# Altium PCB PCB_Persion_Counter.PcbDoc
Units mil, origin at the board's own origin, x right, y up, seen from the top; angles counter-clockwise.
Board outline 3190.03 x 2460.03 mil, 2 copper layers (Top Layer, Bottom Layer); 56 components, 63 nets, 203 pads, 39 vias.
Unrouted connection lines stored in the file: 2.
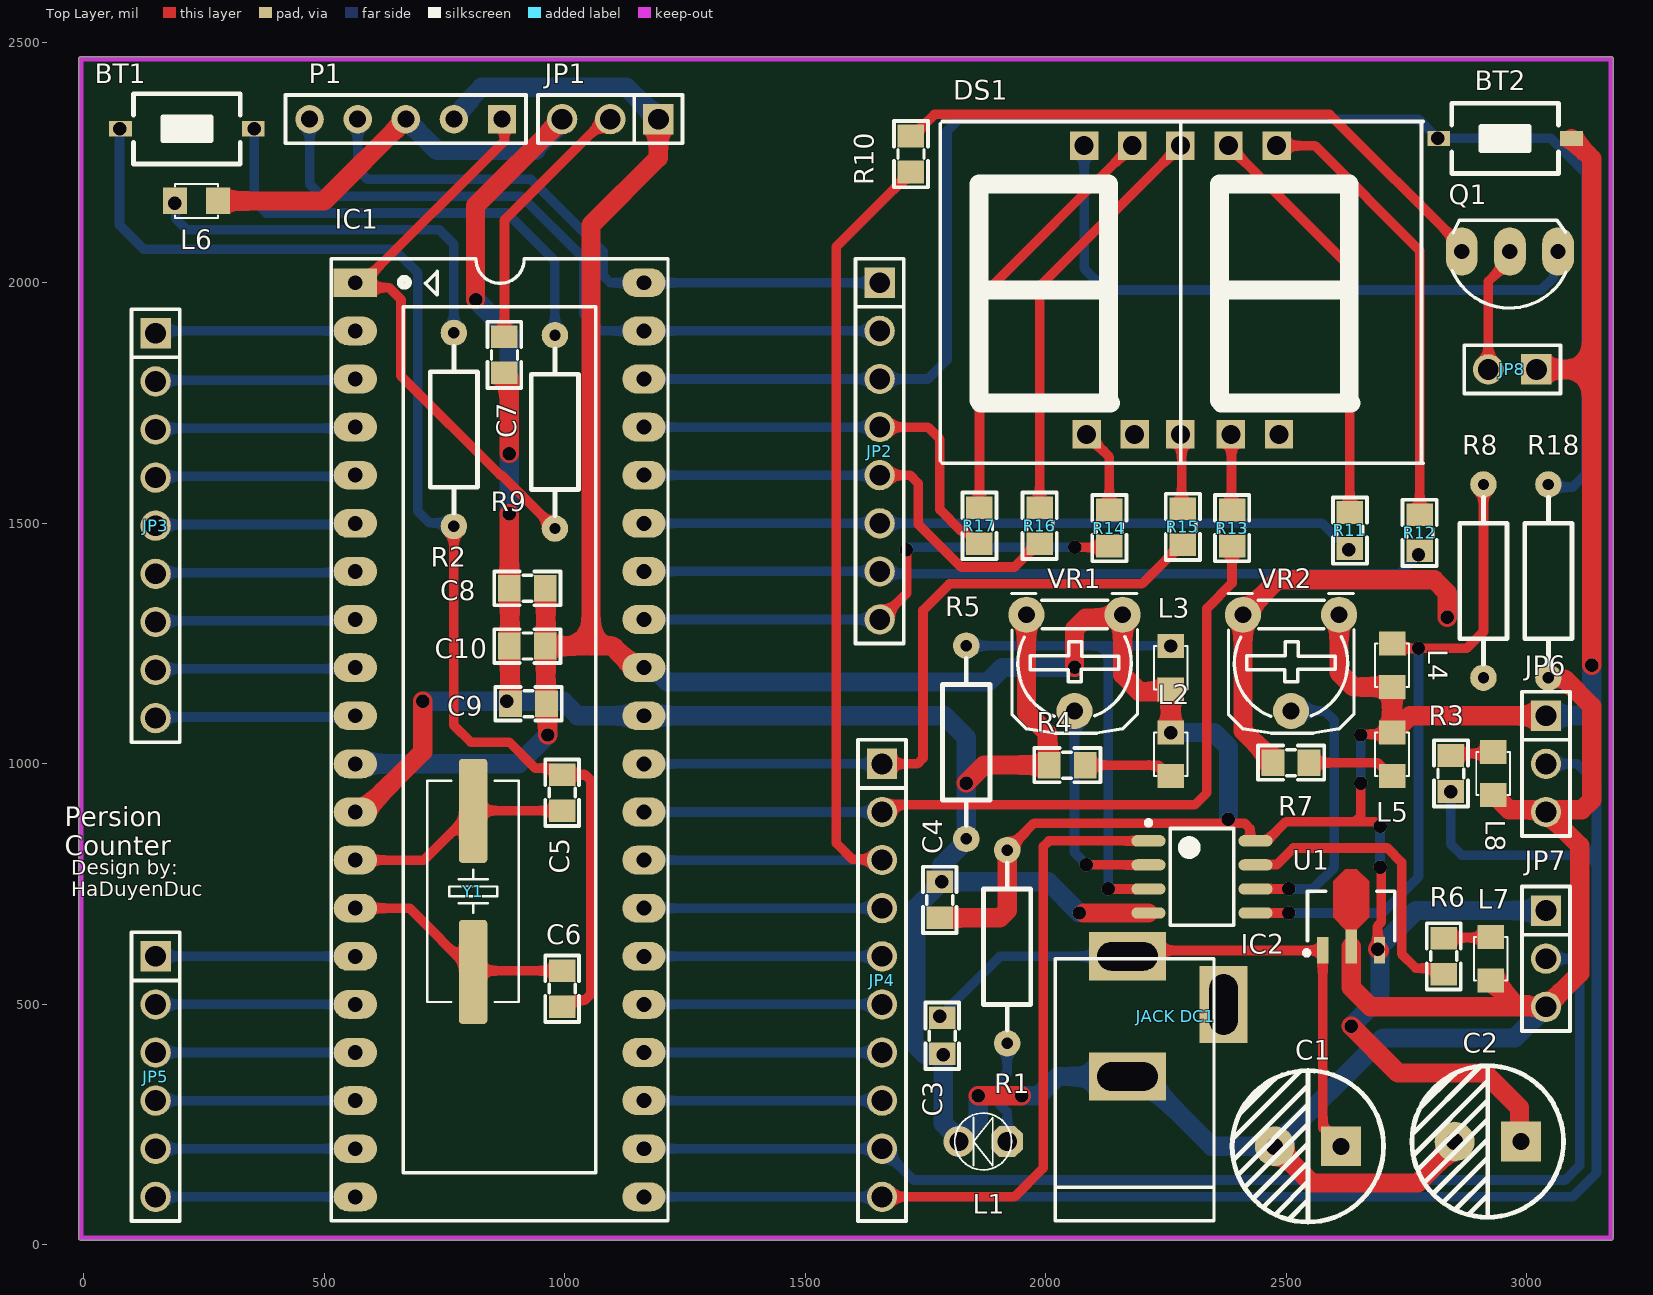
[diagram p0: Top Layer view]
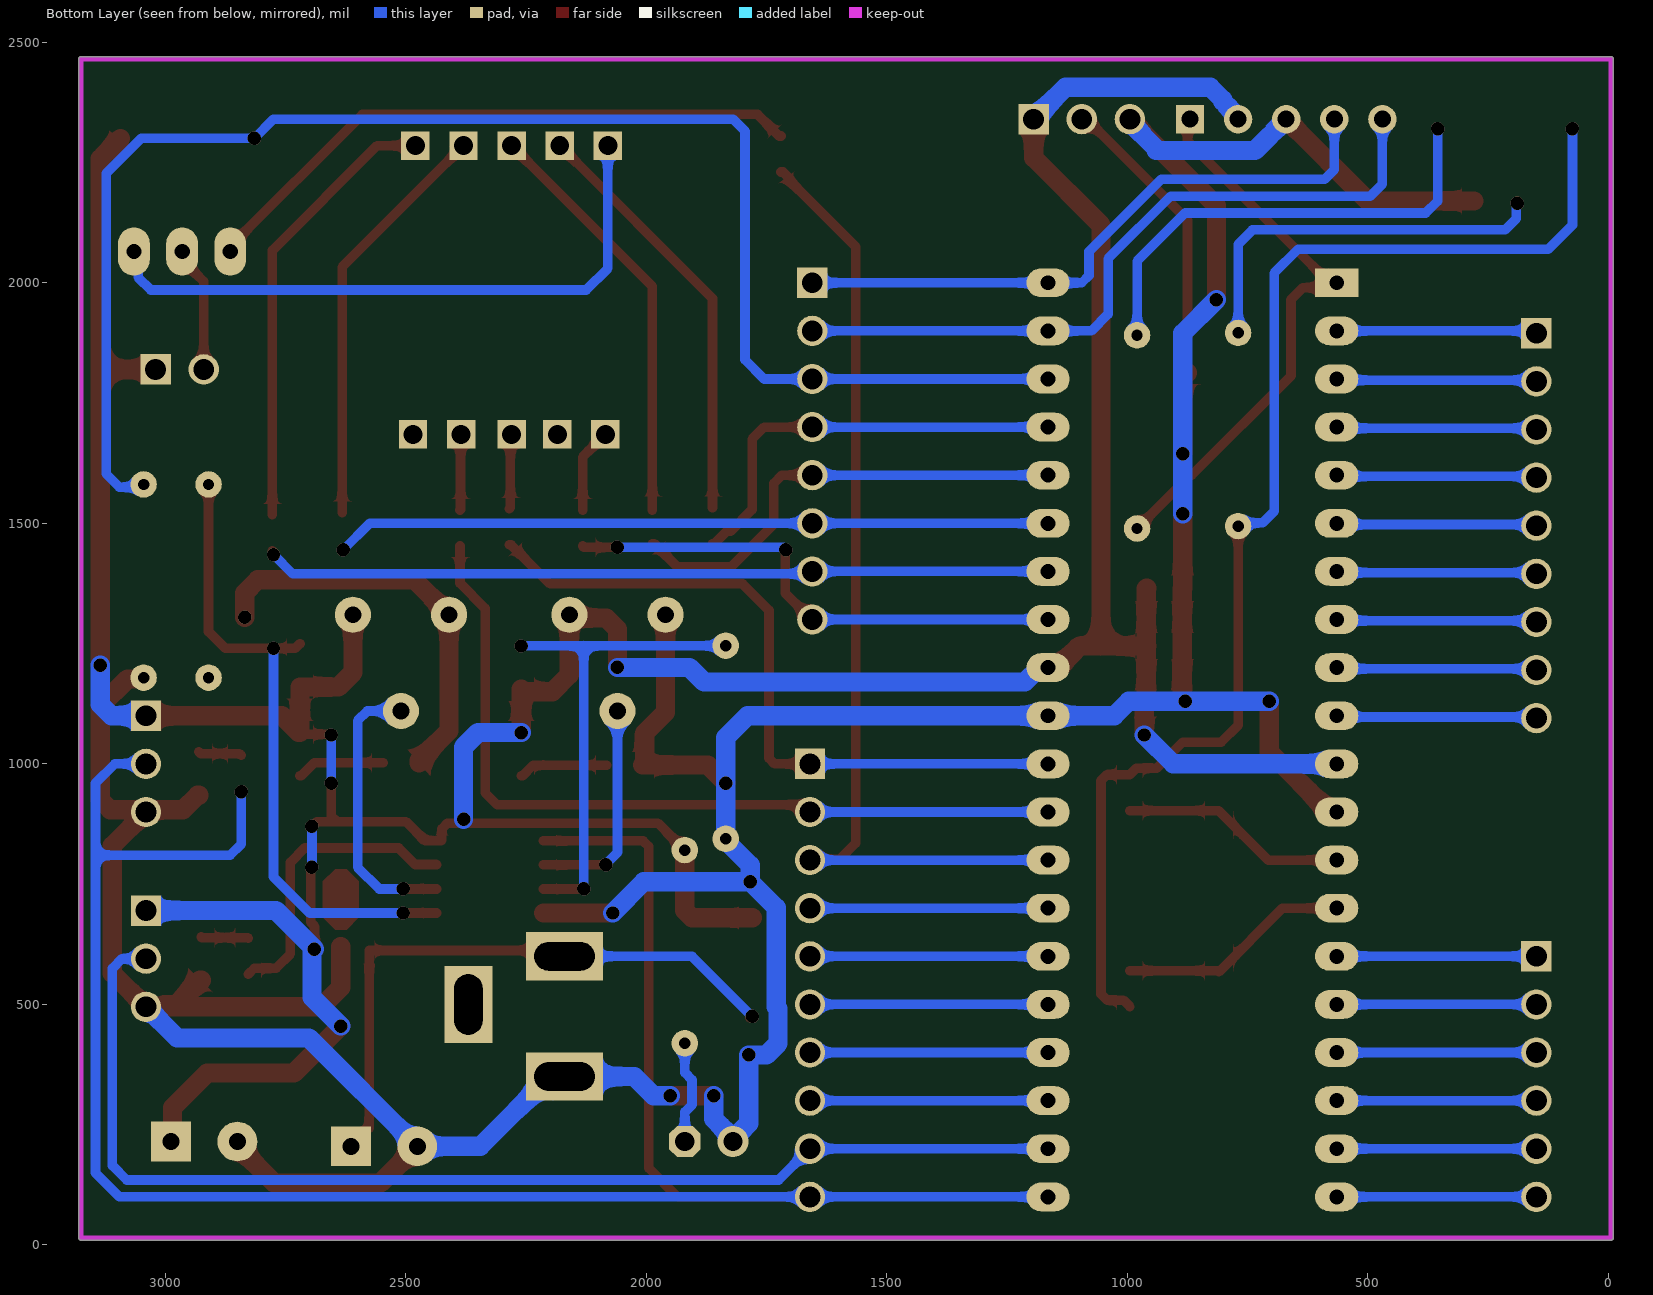
[diagram p1: Bottom Layer view, seen from below]

## Layer stack, top to bottom
Top Solder: solder mask 0.4, Solder Resist, Dk 3.5
Top Layer: signal copper 1.4
Dielectric 1: dielectric 12.6, FR-4, Dk 4.8
Bottom Layer: signal copper 1.4
Bottom Solder: solder mask 0.4, Solder Resist, Dk 3.5

## Board outline
-10.01,15 ccw(c-5,15) -5,9.99 3175,9.99 ccw(c3175,15) 3180.02,15 3180.02,2465 ccw(c3175,2465) 3175,2470.02 3090,2470.02 -5,2470.01 ccw(c-5,2465) -10.01,2465

## Design rules (kind name [scope] priority, off if disabled: settings)
Clearance POLYGON [InPolygon] p1: gap=30 ignorepadtopadclearanceinfootprint=FALSE
Clearance [All] p2: gap=15 ignorepadtopadclearanceinfootprint=FALSE
DiffPairsRouting [All] p1: maxlimit=40 minlimit=10 mostfreqgap=20 toplayer_minwidth=10 toplayer_maxwidth=40 toplayer_prefwidth=20 bottomlayer_minwidth=10 bottomlayer_maxwidth=40 bottomlayer_prefwidth=20 maxuncoupledlength=500
PolygonConnect [All] p1: connectstyle=Relief reliefconductorwidth=10 reliefentries=4 polygonreliefangle="90 Angle" airgapwidth=10
RoutingVias [All] p1: holewidth=28 width=50 viastyle="Through Hole" minholewidth=20 minwidth=10 maxholewidth=30 maxwidth=15
SolderMaskExpansion [All] p1: expansion=4 istentingtop=FALSE
Width [All] p1: maxlimit=40 minlimit=10 preferedwidth=20
29 further rules are at their usual default settings.

## Components (designator, comment, footprint, x,y, rotation, side; value= is the part's Value field where it differs from the comment)
BT1 "Nut Nhan 2 Chan SMD 3x6x2.5" "Nut Nhan 2 Chan SMD 3x6x2.5" 215,2320 r0 top
BT2 "Nut Nhan 2 Chan SMD 3x6x2.5" "Nut Nhan 2 Chan SMD 3x6x2.5" 2955,2300 r0 top
C1 "470uF" "tu hoa 8mm" 2545,205 r180 top
C2 "470uF" "tu hoa 8mm" 2918.9,215 r180 top
C3 "104" "tu 0805" 1785,435 r270 top
C4 "104" "tu 0805" 1779.87,717.23 r90 top
C5 "33pF" "tu 0805" 995,940 r90 top
C6 "33pF" "tu 0805" 994.87,532.43 r90 top
C7 "104" "tu 0805" 875,1850 r90 top
C8 "104" "tu 0805" 922.77,1364.87 r180 top
C9 "104" "tu 0805" 925,1125 r180 top
C10 "104" "tu 0805" 922.77,1244.87 r180 top
DS1 "7SEGX2" LED7SEGX2 2030,1980 r0 top
IC1 "16F877A" DIP40/W0.6 865,1025 r270 top locked
IC2 "LM358 SOP8" "SOP 8" 2325,765 r0 top
"JACK DC1" "JACK DC 5.5" "JACK DC 5.5" 2270,475 r90 top locked value="Jac DC"
JP1 "JP 1x3 2.54" "JP 1x3 DT" 1195,2340 r180 top
JP2 "JP 1x8 2.54" "JP 1x8 DT" 1655,2000 r270 top
JP3 "JP 1x9 2.54" "JP 1x9 DT" 150,1895 r270 top
JP4 "JP 1x10 2.54" "JP 1x10 DT" 1660,1000 r270 top
JP5 "JP 1x6 2.54" "JP 1x6 DT" 150,600 r270 top
JP6 "JP 1x3 2.54" "JP 1x3 DT" 3040,1100 r270 top
JP7 "JP 1x3 2.54" "JP 1x3 DT" 3040,695 r270 top
JP8 "JP 1x2 2.54" "JP 1x2 DT" 3020,1820 r180 top
L1 "LED 3mm" LED-3MM-RED 1920,215 r180 top
L2 "LED 0805" LED-0805-Blue 2260,1065 r270 top
L3 "LED 0805" LED-0805-Green 2260,1155 r90 top
L4 "LED 0805" LED-0805-Green 2720,1160 r90 top
L5 "LED 0805" LED-0805-Blue 2720,1065 r270 top
L6 "LED 0805" LED-0805-Red 190,2170 r0 top
L7 "LED 0805" LED-0805-Red 2925,640 r270 top
L8 "LED 0805" LED-0805-Red 2930,1025 r270 top
P1 "ICSP-PIC" HDR1X5 870,2340 r180 top
Q1 "C1815" TO92 2965,2065 r180 top value=C9014
R1 "330k" "tro vach 1/4w" 1920,620 r90 top
R2 "330k" "tro vach 1/4w" 770,1695 r270 top
R3 "330R" "Tro SMD 0805" 2840,980 r90 top
R4 "330R" "Tro SMD 0805" 2045,995 r180 top
R5 "10k" "tro vach 1/4w" 1835,1045 r90 top
R6 "330R" "Tro SMD 0805" 2825,600 r90 top
R7 "330R" "Tro SMD 0805" 2510,1000 r180 top
R8 "10k" "tro vach 1/4w" 2910,1380 r90 top
R9 "10k" "tro vach 1/4w" 980,1690 r270 top
R10 "1k" "tro smd 0805" 1717.61,2267.43 r90 top
R11 "330R" "Tro SMD 0805" 2630,1485 r90 top
R12 "330R" "Tro SMD 0805" 2775,1480 r90 top
R13 "330R" "Tro SMD 0805" 2385,1490 r90 top
R14 "330R" "Tro SMD 0805" 2130,1490 r90 top
R15 "330R" "Tro SMD 0805" 2282.61,1492.43 r90 top
R16 "330R" "Tro SMD 0805" 1985,1495 r90 top
R17 "330R" "Tro SMD 0805" 1860,1495 r90 top
R18 "10k" "tro vach 1/4w" 3045,1380 r90 top
U1 "78L05 SMD SOT89" SOT89 2635,682.99 r90 top
VR1 "10K" "Bien Tro Tam Giac Dung" 2160,1310 r180 top
VR2 "10K" "Bien Tro Tam Giac Dung" 2610,1310 r180 top
Y1 "16Mhz" "Thach Anh 2 chan SMD" 810,735 r90 top value=4Mhz

## Footprints (in the part's own frame and the unit in brackets; to place one, negate y for a bottom-side part, rotate by r counter-clockwise, add the part's x,y. Pads: shape width x height; smd on the part's side, far side on the other; paste and mask are expansions set on the pad)
"Bien Tro Tam Giac Dung" [mil] "RM065"
  round 75 hole 35: 1(0,0) 2(100,200) 3(200,0)
  silkscreen extent -31,-44 231,246, body extent -28,-50 228,228, height 279
DIP40/W0.6 [mil] "40 PIN, W 600mil, Pin to pin 100mil"
  rect 60x90 hole 31: 1(-975,-300)
  oval 60x90 hole 31: 2(-875,-300) 3(-775,-300) 4(-675,-300) 5(-575,-300) 6(-475,-300) 7(-375,-300) 8(-275,-300) 9(-175,-300) 10(-75,-300) 11(25,-300) 12(125,-300) 13(225,-300) 14(325,-300) 15(425,-300) 16(525,-300) 17(625,-300) 18(725,-300) 19(825,-300) 20(925,-300) 21(925,300) 22(825,300) 23(725,300) 24(625,300) 25(525,300) 26(425,300) 27(325,300) 28(225,300) 29(125,300) 30(25,300) 31(-75,300) 32(-175,300) 33(-275,300) 34(-375,300) 35(-475,300) 36(-575,300) 37(-675,300) 38(-775,300) 39(-875,300) 40(-975,300)
  silkscreen extent -1025,-350 975,350, body extent -1057,-310 1007,300, height 224
HDR1X5 [mm] "Connector; Header; 5 Position"
  rect 1.5x1.5 hole 0.9: 1(0,0)
  round 1.5 hole 0.9: 2(2.54,0) 3(5.08,0) 4(7.62,0) 5(10.16,0)
  silkscreen extent -1.27,-1.27 11.43,1.27, body extent -1.38,-1.26 11.57,1.24, height 8.52
"JACK DC 5.5" [mil] "Jac DC input"
  rect 100x160 hole 59.06 slot 125.98 at 90 deg: 1(125,100) 2(-125,100)
  rect 160x100 hole 59.06 slot 125.98 at 0 deg: 3(25,-100)
  silkscreen extent -425,-80 120,250, body extent -410,-105 134,269, height 434
"JP 1x2 DT" [mm] "2 pins, 1 row, straight, gold plating"
  rect 1.6x1.6 hole 1.1: 1(0,0)
  round 1.6 hole 1.1: 2(2.54,0)
  silkscreen extent -1.27,-1.27 3.81,1.27, body extent -1.27,-1.27 3.81,1.27, height 8.54
"JP 1x3 DT" [mm]
  rect 1.6x1.6 hole 1.1: 1(0,0)
  round 1.6 hole 1.1: 2(2.54,0) 3(5.08,0)
  silkscreen extent -1.27,-1.27 6.35,1.27, body extent -1.27,-1.27 6.35,1.27, height 8.54
"JP 1x6 DT" [mm] "6 pins, 1 row, straight, gold plating"
  rect 1.6x1.6 hole 1.1: 1(0,0)
  round 1.6 hole 1.1: 2(2.54,0) 3(5.08,0) 4(7.62,0) 5(10.16,0) 6(12.7,0)
  silkscreen extent -1.27,-1.27 13.97,1.27, body extent -1.27,-1.27 13.97,1.27, height 8.54
"JP 1x8 DT" [mm] "8 pins, 1 row, straight, gold plating"
  rect 1.6x1.6 hole 1.1: 1(0,0)
  round 1.6 hole 1.1: 2(2.54,0) 3(5.08,0) 4(7.62,0) 5(10.16,0) 6(12.7,0) 7(15.24,0) 8(17.78,0)
  silkscreen extent -1.27,-1.27 19.05,1.27, body extent -1.27,-1.27 19.05,1.27, height 8.54
"JP 1x9 DT" [mm] "9 pins, 1 row, straight, gold plating"
  rect 1.6x1.6 hole 1.1: 1(0,0)
  round 1.6 hole 1.1: 2(2.54,0) 3(5.08,0) 4(7.62,0) 5(10.16,0) 6(12.7,0) 7(15.24,0) 8(17.78,0) 9(20.32,0)
  silkscreen extent -1.27,-1.27 21.59,1.27, body extent -1.27,-1.27 21.59,1.27, height 8.54
"JP 1x10 DT" [mm] "10 pins, 1 row, straight, gold plating"
  rect 1.6x1.6 hole 1.1: 1(0,0)
  round 1.6 hole 1.1: 2(2.54,0) 3(5.08,0) 4(7.62,0) 5(10.16,0) 6(12.7,0) 7(15.24,0) 8(17.78,0) 9(20.32,0) 10(22.86,0)
  silkscreen extent -1.27,-1.27 24.13,1.27, body extent -1.27,-1.27 24.13,1.27, height 8.54
LED7SEGX2 [mm] "LED7SEG"
  round 1.524 on Top Overlay: 0(4.318,-7.112) 0(17.018,-7.112)
  rect 1.5x1.5 hole 1: 1(1.397,-7.493) 2(3.937,-7.493) 3(6.35,-7.493) 4(9.017,-7.493) 5(11.557,-7.493) 6(11.43,7.747) 7(8.89,7.747) 8(6.35,7.747) 9(3.81,7.747) 10(1.27,7.747)
  silkscreen extent -6.32,-9.02 19.18,9.02, body extent -6.35,-9.53 19.05,9.53, height 8.03
LED-3MM-RED [mil]
  oct 65x65 hole 40: 1(0,0)
  round 65 hole 40: 2(100,0)
  silkscreen extent -9,-59 109,59, body extent -27,-77 117,80, height 181
LED-0805-Blue [mil]
  rect 50x55 smd: 1(0,0) 2(90,0)
  silkscreen extent 0,-35 90,35, body extent 5,-25 85,25, height 43
LED-0805-Green [mil]
  rect 50x55 smd: 1(0,0) 2(90,0)
  silkscreen extent 0,-35 90,35, body extent 5,-25 85,25, height 43
LED-0805-Red [mil]
  rect 50x55 smd: 1(0,0) 2(90,0)
  silkscreen extent 0,-35 90,35, body extent 5,-25 85,25, height 43
"Nut Nhan 2 Chan SMD 3x6x2.5" [mm] "Switch SMD type"
  rect 1.2x0.8 smd: 1(-3.5,0) 2(3.5,0)
  silkscreen extent -2.82,-1.85 2.82,1.85, body extent -3.05,-1.85 3.05,1.85, height 2.5
"SOP 8" [mm] "SOIC, 8-Leads, Body 4.9x3.9mm, Pitch 1.27mm, IPC High Density"
  oval 1.8x0.6 smd: 1(-2.825,1.905) 2(-2.825,0.635) 3(-2.825,-0.635) 4(-2.825,-1.905) 5(2.825,-1.905) 6(2.825,-0.635) 7(2.825,0.635) 8(2.825,1.905)
  silkscreen extent -2.95,-2.55 1.68,2.98, body extent -2.99,-2.45 3,2.45, height 1.6
SOT89 [mm] "SOT89, 3-Leads, Body 4.55x2.55mm, Pitch 1.50mm, Lead Span 4.1mm, IPC Medium Density"
  rect 1.4x0.6 smd: 1(-1.8,1.5) 3(-1.8,-1.5)
  rect 1.8x0.6 smd: 2(-1.6,0)
  Top Layer region: -0.7,0.3 -0.05,0.95 1.85,0.95 2.5,0.3 2.5,-0.3 1.85,-0.95 -0.05,-0.95 -0.7,-0.3
  silkscreen extent -2.05,-2.3 1.32,2.47, body extent -2.16,-2.25 1.84,2.25, height 1.5
"Thach Anh 2 chan SMD" [mm] "SMD Crystal HC49/US-SM package"
  round 0.508 on Mech15: 0(0,0)
  rrect25% 5.5x1.5 smd: 1(-4.25,0) 2(4.25,0)
  silkscreen extent -5.84,-2.41 5.84,2.41, body extent -6.4,-2.41 6.4,2.42, height 4.29
TO92 [mil] "TO-92"
  oval 66x100 hole 32: 1(-100,0) 2(0,0) 3(100,0)
  silkscreen extent -117,-65 120,118, body extent -109,-66 109,95, height 245
"Tro SMD 0805" [mm]
  rect 1.2x1.4 smd: 1(-0.946,-0.061) 2(0.954,-0.061)
  silkscreen extent -1.75,-0.97 1.75,0.84, body extent -1.56,-0.76 1.44,0.64, height 0.53
"tro smd 0805" [mm]
  rect 1.2x1.4 smd: 1(-0.946,-0.061) 2(0.954,-0.061)
  silkscreen extent -1.75,-0.97 1.75,0.84, body extent -1.56,-0.76 1.44,0.64, height 0.53
"tro vach 1/4w" [mm]
  round 1.4 hole 0.6: 1(-5.1,0) 2(5.1,0)
  silkscreen extent -4.39,-1.25 4.42,1.25, body extent -5.38,-1.2 5.38,1.2, height 2.41
"tu 0805" [mm] "Compoment SMD 80x50mil"
  rect 1.2x1.4 smd: 1(-0.946,-0.003) 2(0.954,-0.003)
  silkscreen extent -1.75,-0.89 1.75,0.89, body extent -1.01,-0.64 1.01,0.63, height 0.61
"tu hoa 8mm" [mm]
  rect 2.1x2.1 hole 0.9: 1(-1.75,0)
  round 2.1 hole 0.9: 2(1.75,0)
  silkscreen extent -4,-4 4,4, body extent -4.1,-4.07 4.1,4.13, height 13.81

## Part data
C1 C2: library part "Tu Hoa 470uF 16V 8x11", "Cắm", Chung_Loai=Cắm, Don_Vi=Con, Ma_Hang=MH006550, So_Chan=2, Ten_Linh_Kien="Tụ Hóa 470uF 16V 8x11MM"
C3 C4 C7 C8 C9 C10: library part "Tu 0805 104 50V 10%", "Dán", Chung_Loai=Dán, Don_Vi=Con, Ma_Hang=MH004551, So_Chan=2, Ten_Linh_Kien="Tụ 0805 104-100nF 10% 50V"
C5 C6: library part "Tu 0805 33pF 50V 10%", "Dán", Chung_Loai=Dán, Don_Vi=Con, Ma_Hang=MH004563, So_Chan=2, Ten_Linh_Kien="Tụ 0805 33p 10% 50V"
DS1: library part "LED 7SEGX2", "14.2 mm General Purpose Blue 7-Segment Display: CA, RH DP, Gray Surface", Colour=Blue, PackageDocument=24-Sep-2002, ComponentLink1Description="Manufacturer Link", ComponentLink1URL=http://www.agilent.com/, DatasheetDocument=24-Sep-2002, LatestRevisionDate=17-Dec-2003, LatestRevisionNote="Schematic revised, PCB Footprint replaced.", MinimumIntensity="2020 ucd", Note="IF = 10 mA", PackageReference=H, Published=8-Jun-2000, Publisher="Altium Limited"
IC1: library part "PIC 16F877A"
IC2 U1: "Dán", Chung_Loai=Dán, Don_Vi=Con
  IC2: Ma_Hang=MH000609, Ten_Linh_Kien="LM358 SOP8"
  U1: Ma_Hang=MH004845, Ten_Linh_Kien="78L05 SOT89 0.1A 5V"
JP1 JP6 JP7: library part "JP 1x3 2.54 Duc Thang", "Cắm", Chung_Loai=Cắm, Don_Vi=Con, Ma_Hang=MH000903, Ten_Linh_Kien="Jump Đơn Đực 2.54MM 1x40P Thẳng 11MM"
JP2: library part "JP 1x8 2.54 Duc Thang", "Cắm", Chung_Loai=Cắm, Don_Vi=Con, Ma_Hang=MH000903, Ten_Linh_Kien="Jump Đơn Đực 2.54MM 1x40P Thẳng 11MM"
JP3: library part "JP 1x9 2.54 Duc Thang", "Cắm", Chung_Loai=Cắm, Don_Vi=Con, Ma_Hang=MH000903, Ten_Linh_Kien="Jump Đơn Đực 2.54MM 1x40P Thẳng 11MM"
JP4: library part "JP 1x10 2.54 Duc Thang", "Cắm", Chung_Loai=Cắm, Don_Vi=Con, Ma_Hang=MH000903, Ten_Linh_Kien="Jump Đơn Đực 2.54MM 1x40P Thẳng 11MM"
JP5: library part "JP 1x6 2.54 Duc Thang", "Cắm", Chung_Loai=Cắm, Don_Vi=Con, Ma_Hang=MH000903, Ten_Linh_Kien="Jump Đơn Đực 2.54MM 1x40P Thẳng 11MM"
JP8: library part "JP 1x2 2.54 Duc Thang", "Cắm", Chung_Loai=Cắm, Don_Vi=Con, Ma_Hang=MH000903, Ten_Linh_Kien="Jump Đơn Đực 2.54MM 1x40P Thẳng 11MM"
L1: library part "LED 3mm Do", "Cắm", Chung_Loai=Cắm, Don_Vi=Con, Ma_Hang=MH003892, Ten_Linh_Kien="Led 3MM Phủ Đỏ (10c)"
L2 L5: library part "LED 0805 Xanh Duong", "Dán", Chung_Loai=Dán, Don_Vi=Con, Ma_Hang=MH002327, Ten_Linh_Kien="LED 0805 Màu Xanh Dương (Blue)"
L3 L4: library part "LED 0805 Xanh La", "Dán", Chung_Loai=Dán, Don_Vi=Con, Ma_Hang=MH002326, Ten_Linh_Kien="LED 0805 Màu Xanh Lá (Green)"
L6 L7 L8: library part "LED 0805 Do", "Dán", Chung_Loai=Dán, Don_Vi=Con, Ma_Hang=MH000897, Ten_Linh_Kien="LED 0805 Màu Đỏ (Red)"
P1: "Header, 5-Pin", LatestRevisionDate=17-Jul-2002, LatestRevisionNote="Re-released for DXP Platform.", Publisher="Altium Limited"
Q1: "NPN transistor"
R1 R2: library part "Tro Vach 1/4W 5% 330k", "Cắm", Chung_Loai=Cắm, Don_Vi=Con, Ma_Hang=MH007312, So_Chan=2, Ten_Linh_Kien="Trở Vạch 1/4w 5% 330k"
R3 R4 R6 R7 R11 R12 R13 R14 R15 R16 R17: library part "Tro 0805 5% 330R", "Dán", Chung_Loai=Dán, Don_Vi=Con, Ma_Hang=MH005337, So_Chan=2, Ten_Linh_Kien="Trở 0805 5% 330R"
R5 R8 R9 R18: library part "Tro Vach 1/4W 5% 10k", "Căm", Chung_Loai=Cắm, Don_Vi=Con, Ma_Hang=MH007354, So_Chan=2, Ten_Linh_Kien="Trở Vạch 1/4w 5% 10K"
R10: library part "Tro 0805 1% 1k", "Dán", Chung_Loai=Dán, Don_Vi=Con, Ma_Hang=MH005468, So_Chan=2, Ten_Linh_Kien="Trở 0805 1% 1k"
VR1 VR2: library part "Bien tro tam giac 10K Dung", "Cắm", Chung_Loai=Cắm, Don_Vi=Con, Ma_Hang=MH000919, Ten_Linh_Kien="Biến Trở Tam Giác 103-10K RM065 (Chân Đứng)"
Y1: library part "Thach Anh 2 chan SMD", "Crystal For all Crystal 2pin."
BT1 BT2: Ma_Hang=MH001036, Ten="Nút Nhấn 2 Chân 3x6x2.5MM SMD"

## Via types
v1: diameter 28, hole 28, Top Layer to Bottom Layer, tented both sides, 39 vias

## Nets (pads, with @x,y where several pads share a name; then routed paths per layer and width w, separated by ;. In a path a pad name is that pad's centre, name@x,y a point inside that pad or via, vN(x,y) a via of type N, cw(c..) or ccw(c..) an arc to the next point about the centre after c; other vN are vias at no path point)
5V: BT2.2 C2.1 C4.1 C8.1 C9.1 C10.1 IC1.11 IC1.32 IC2.8 JP1.1 JP6.1 JP7.1 JP8.1 L2.1 L3.1 L4.1 L5.1 P1.2 R1.2 U1.3 VR1.1 VR2.1 | length 9069.5
  Top Layer w20: R1.2 1976.02,876.81 2413.28,876.81 2425,865.1 2425,841.67 2426.67,840 IC2.8 2459.84,840 2499.84,880 2643.28,880 ; v1(2655,960) 2655,891.72 2643.28,880 ; v1(2655,1060) 2656.53,1061.53 2716.53,1061.53 L5.1 ; v1(2690,615) 2690,663.27 2697.4,670.67 2697.4,782.6 v1(2695,785) ; v1(2695,870) 2685,880 2643.28,880
  Top Layer w40: C10.1 C10.1@961.11,1245 ; C8.1 961.11,1363.89 C10.1@961.11,1245 ; v1(965,1060) 965,1122.36 C9.1 961.11,1126.25 C10.1@961.11,1245 ; IC1.32 1144.59,1200 1099.59,1245 1055,1245 ; JP1.1 1195,2260 1055,2120 1055,1245 ; C4.1 1905,680 1920,695 R1.2 ; v1(2060,1200.39) 2060,1279.87 2083.43,1303.3 2153.3,1303.3 VR1.1 2160,1185 2195,1150 2255,1150 L3.1 v1(2260,1065) ; VR2.1 2610,1190 2640,1160 L4.1 L5.1 2722.5,1065 2757.5,1100 JP6.1 ; v1(2635,455) 2732.5,357.5 2912.5,357.5 2985,285 2985,260 ; v1(2690,615) 2691.18,615 U1.3 ; JP8.1 3135,1820 ; BT2.2 3135,2257.8 3135,1820 ; v1(3135,1205) 3135,1820 ; C10.1@961.11,1245 1055,1245
  Bottom Layer w20: v1(2655,960) v1(2655,1060) ; v1(2695,785) v1(2695,870)
  Bottom Layer w40: IC1.11 905,1000 v1(965,1060) ; P1.2 770,2345.16 801.93,2377.09 801.93,2380.48 827.94,2406.5 1128.5,2406.5 JP1.1@1203.92,2331.08 ; IC1.32 1183.43,1200 1213.43,1170 1549.62,1170 1880,1170 1910.39,1200.39 v1(2060,1200.39) ; v1(2260,1065) 2350,1065 2380,1035 v1(2380,885) ; v1(2635,455) 2695,515 2695,610 v1(2690,615) 2770,695 JP7.1 ; JP6.1 3111.57,1100 3135,1123.43 v1(3135,1205)
GND: "JACK DC1.2" C1.2 C2.2 C3.2 C4.2 C7.1 C8.2 C9.2 C10.2 IC1.12 IC1.31 IC2.4 JP1.3 JP6.3 JP7.3 L1.2 L6.2 L7.2 L8.2 P1.3 R4.2 R5.1 R7.2 R8.1 R18.1 U1.2 VR1.3 VR2.3 | length 10092.9
  Top Layer w40: L6.2 500,2170 P1.3 ; IC1.12 580,900 705,1025 v1(705,1130) ; v1(815,1965) 815,2160 JP1.3 ; C7.1 879.07,1812.77 882.69,1809.15 882.69,1805.21 885,1802.91 v1(885,1645) ; v1(885,1520) 885.2,1519.8 C8.2 886.31,1363.89 C9.2@886.31,1130 ; v1(1835,960) 1872.39,997.39 R4.2 2003.8,1001.02 2003.8,1063.67 1960,1107.47 VR1.3 ; v1(1860,310) v1(1950,310) ; v1@2078.43,690 IC2.4 ; R7.2 2472.43,1006.33 2410,1068.76 VR2.3 2482.5,1382.5 2807.5,1382.5 2835,1355 v1(2835,1305) ; C1.2 2552.44,128.66 2773.66,128.66 2850,205 C2.2 ; U1.2 2635,535 2675,495 JP7.3 3110,565 3110,830 JP6.3 ; L7.2 2927.5,550 2978.1,499.4 3002.45,499.4 ; L8.2 2932.5,935 2963.1,904.4 3035.6,904.4 JP6.3 ; R18.1 3047.89,1176.32 3078.68,1176.32 3135,1120 3135,925 3114.4,904.4 3044.4,904.4 JP6.3
  Bottom Layer w40: P1.3 735,2275 940,2275 940,2278.78 995,2333.78 JP1.3 ; v1(705,1130) v1(880,1130) 997.29,1130 1027.29,1100 IC1.31 1790,1100 1835,1055 v1(1835,960) R5.1 1835,840.12 1783.94,789.06 v1(1783.94,754.8) ; v1(815,1965) 885,1895 v1(885,1645) v1(885,1520) ; L1.2 L1.2@1820,220 ; v1(1860,310) 1860,261.76 1820,221.76 L1.2@1820,220 ; v1(1950,310) 1985,310 2025,350 2170,350 2200,350 2345,205 C1.2 2701.1,430 2975,430 JP7.3 ; v1(2070,690) 2005.2,754.8 v1(1783.94,754.8) ; v1(1783.94,754.8) 1730,700.87 1730,495 1726.5,491.5 1726.5,418.5 1750,395 v1(1787.29,395) 1787.29,252.71 L1.2@1820,220
LED: DS1.10 Q1.1 | length 1318.1
  Bottom Layer w20: DS1.10 2080,2030 2125,1985 3030,1985 3056.2,2011.2 3056.2,2056.2 Q1.1
NetBT1_1: BT1.1 C5.2 C6.1 R2.2 | length 2707.6
  Top Layer w20: v1(75,2320) BT1.1 ; R2.2 770,1080 805,1045 885,1045 938.8,991.2 981.51,991.2 C5.2 1042.57,977.57 1055,965.15 1055,521.72 1042.1,508.82 1008.62,508.82 C6.1
  Bottom Layer w20: v1(75,2320) 75,2120 125,2070 645,2070 695,2020 695,1525 719.07,1500.93 763.28,1500.93 R2.2
NetBT1_2: BT1.2 R9.1 | length 983.2
  Top Layer w20: BT1.2 v1(355,2320)
  Bottom Layer w20: v1(355,2320) 355,2170 380,2145 880,2145 980,2045 R9.1
NetC1_1: "JACK DC1.1" C1.1 C3.1 U1.1 | length 1281.6
  Top Layer w20: v1(1780,475) 1782.77,472.23 C3.1 ; 2170,600 2182.13,612.13 U1.1 2575.94,242.95 C1.1
  Bottom Layer w20: v1(1780,475) 1905,600 2170,600
NetC7_2: C7.2 JP1.2 | length 549.4
  Top Layer w20: C7.2 875.13,2130.13 1085,2340 JP1.2
NetDS1_1: DS1.1 R14.2 | length 177.1
  Top Layer w20: DS1.1 2132.39,1637.61 R14.2
NetDS1_3: DS1.3 R15.2 | length 157.1
  Top Layer w20: DS1.3 2282.5,1682.5 2282.5,1532.5 R15.2
NetDS1_4: DS1.4 R13.2 | length 158.4
  Top Layer w20: DS1.4 2386.2,1683.8 2386.2,1528.77 R13.2
NetDS1_6: DS1.6 R12.2 | length 937.1
  Top Layer w20: DS1.6 2559.41,2285 2777.39,2067.01 R12.2
NetDS1_7: DS1.7 R11.2 | length 867
  Top Layer w20: DS1.7 2632.39,2032.61 R11.2
NetDS1_8: DS1.8 R16.2 | length 878.6
  Top Layer w20: R16.2@1987.39,1527.57 1987.39,1992.39 DS1.8
NetDS1_9: DS1.9 R17.2 | length 884
  Top Layer w20: R17.2 1862.39,1967.39 DS1.9
NetIC2_2: IC2.2 VR1.2 | length 459.7
  Top Layer w20: v1(2084,790) IC2.2
  Bottom Layer w20: VR1.2 2060,816.16 2084,792.16 v1(2084,790)
NetIC2_3: IC2.3 L3.2 R5.2 | length 1014.5
  Top Layer w20: v1(2130,740) IC2.3
  Bottom Layer w20: R5.2 1835.39,1245.39 2130,1245.39 ; v1(2130,740) 2130,1245.39 ; v1(2260,1245) 2259.61,1245.39 2130,1245.39
NetIC2_5: IC2.5 L4.2 R8.2 | length 1359.3
  Top Layer w20: IC2.5 v1(2505,690) ; L4.2 2730,1240 v1(2775,1240) 2875,1240 2910,1275 R8.2
  Bottom Layer w20: v1(2505,690) 2700,690 2775,765 v1(2775,1240)
NetIC2_6: IC2.6 VR2.2 | length 585.7
  Top Layer w20: IC2.6 v1(2505,740)
  Bottom Layer w20: v1(2505,740) 2555,740 2600,785 2600,1090 2580,1110 VR2.2
NetIC2_7: IC2.7 R6.1 | length 625.7
  Top Layer w20: IC2.7 2436.91,790.69 2480.69,790.69 2515,825 2710.15,825 2740,795.15 2740,605 2769.83,575.17 2815,575.17 R6.1
NetJP8_2: JP8.2 Q1.2 | length 263.6
  Top Layer w20: JP8.2 2920,2003 2965,2048 Q1.2
NetL1_1: L1.1 R1.1 | length 216.6
  Bottom Layer w20: L1.1 1920,276.36 1905,291.36 1905,343.03 1920,358.03 R1.1
NetL2_2: L2.2 R4.1 | length 187
  Top Layer w20: R4.1 2235.11,997.39 2257.5,975 L2.2
NetL5_2: L5.2 R7.1 | length 184.1
  Top Layer w20: R7.1 2690.11,1002.39 2717.5,975 L5.2
NetL6_1: L6.1 R2.1 | length 822
  Top Layer w20: v1(190,2165) L6.1
  Bottom Layer w20: v1(190,2165) 191.53,2163.47 191.53,2133.47 215,2110 740,2110 770,2080 R2.1
NetL7_1: L7.1 R6.2 | length 98.6
  Top Layer w20: R6.2 2828.61,638.79 2923.79,638.79 L7.1
NetL8_1: L8.1 R3.2 | length 90.7
  Top Layer w20: R3.2 2846.11,1021.29 2926.29,1021.29 L8.1
NetQ1_3: Q1.3 R10.2 | length 1287.5
  Top Layer w20: R10.2 1723.94,2305 1768.94,2350 2590,2350 2865,2075 Q1.3
OSC1: C5.1 IC1.13 Y1.2 | length 472.7
  Top Layer w20: IC1.13 707.68,800 Y1.2 810.45,902.77 C5.1
OSC2: C6.2 IC1.14 Y1.1 | length 485.8
  Top Layer w20: IC1.14 677.68,700 Y1.1 812.32,570 C6.2
PGC: IC1.39 JP2.2 P1.5 | length 1513.7
  Bottom Layer w20: P1.5 470,2205 495,2180 910,2180 1040,2050 1040,1935 1075,1900 IC1.39 JP2.2
PGD: IC1.40 JP2.1 P1.4 | length 1316.6
  Bottom Layer w20: P1.4 570,2235 590,2215 930,2215 1080,2065 1080,2015 1095,2000 IC1.40 JP2.1
RA0\: IC1.2 JP3.1 | length 417.1
  Bottom Layer w20: JP3.1 155,1900 IC1.2
RA1: IC1.3 JP3.2 | length 417.1
  Bottom Layer w20: JP3.2 152.5,1797.5 562.5,1797.5 IC1.3
RA2: IC1.4 JP3.3 | length 417.1
  Bottom Layer w20: JP3.3 152.5,1697.5 562.5,1697.5 IC1.4
RA3: IC1.5 JP3.4 | length 417.1
  Bottom Layer w20: JP3.4 152.5,1597.5 562.5,1597.5 IC1.5
RA4: IC1.6 JP3.5 | length 417.1
  Bottom Layer w20: JP3.5 152.5,1497.5 562.5,1497.5 IC1.6
RA5: IC1.7 JP3.6 | length 417.1
  Bottom Layer w20: JP3.6 152.5,1397.5 562.5,1397.5 IC1.7
RB0: IC1.33 JP2.8 R14.1 | length 1085.5
  Top Layer w20: JP2.8 1656.5,1300 1711.5,1355 1711.5,1443.5 v1(1710,1445) ; v1(2060,1450) 2129.62,1450 R14.1
  Bottom Layer w20: IC1.33 JP2.8 ; v1(1710,1445) 1715,1450 v1(2060,1450)
RB1: IC1.34 JP2.7 R12.1 | length 1637.4
  Top Layer w20: v1(2775,1435) 2775,1440.38 R12.1
  Bottom Layer w20: IC1.34 JP2.7 1660,1395 2735,1395 v1(2775,1435)
RB2: IC1.35 JP2.6 R11.1 | length 1491.5
  Top Layer w20: v1(2630,1445) 2632.39,1447.39 R11.1
  Bottom Layer w20: IC1.35 JP2.6 2575,1500 v1(2630,1445)
RB3: IC1.36 JP2.5 R16.1 | length 971.2
  Top Layer w20: JP2.5 1718.28,1600 1735,1583.28 1735,1498.63 1824.48,1409.15 1934.83,1409.15 1983.46,1457.77 R16.1
  Bottom Layer w20: IC1.36 JP2.5
RB4: IC1.37 JP2.4 R17.1 | length 883.6
  Top Layer w20: JP2.4 1755,1700 1780,1675 1780,1528.43 1824.48,1483.95 1832.28,1483.95 1858.46,1457.77 R17.1
  Bottom Layer w20: IC1.37 JP2.4
RB5: BT2.1 IC1.38 JP2.3 R18.2 | length 3222.7
  Bottom Layer w20: IC1.38 JP2.3 1755,1800 1795,1840 1795,2315 1820,2340 2775,2340 v1(2815,2300) 3050,2300 3123,2227 3123,1603 3095,1575 3050.79,1575 R18.2
RC0: IC1.15 JP5.1 | length 415
  Bottom Layer w20: JP5.1 IC1.15
RC1: IC1.16 JP5.2 | length 415
  Bottom Layer w20: JP5.2 IC1.16
RC2: IC1.17 JP5.3 | length 415
  Bottom Layer w20: JP5.3 IC1.17
RC3: IC1.18 JP5.4 | length 415
  Bottom Layer w20: JP5.4 IC1.18
RC4: IC1.23 JP4.8 | length 495
  Bottom Layer w20: IC1.23 JP4.8
RC5: IC1.24 JP4.7 | length 495
  Bottom Layer w20: IC1.24 JP4.7
RC6: IC1.25 JP4.6 | length 495
  Bottom Layer w20: IC1.25 JP4.6
RC7: IC1.26 JP4.5 | length 495
  Bottom Layer w20: IC1.26 JP4.5
RD0: IC1.19 JP5.5 | length 415
  Bottom Layer w20: JP5.5 IC1.19
RD1: IC1.20 JP5.6 | length 415
  Bottom Layer w20: JP5.6 IC1.20
RD2: IC1.21 IC2.1 JP4.10 JP6.2 R3.1 | length 4606.2
  Top Layer w20: JP4.10 1935,100 1995,160 1995,828.28 2006.72,840 IC2.1 ; v1(2842.39,942.39) R3.1
  Bottom Layer w20: IC1.21 JP4.10 3095,100 3145,150 3145,810 ; v1(2842.39,942.39) 2842.39,832.61 2865,810 3145,810 ; JP6.2 3105,1000 3145,960 3145,810
RD3: IC1.22 JP4.9 JP7.2 | length 2472.6
  Bottom Layer w20: IC1.22 JP4.9 1725,135 3080,135 3110,165 3110,575 3090,595 JP7.2
RD4: IC1.27 JP4.4 | length 495
  Bottom Layer w20: IC1.27 JP4.4
RD5: IC1.28 JP4.3 R10.1 | length 2074.5
  Top Layer w20: JP4.3 1658.5,801.5 1598.5,801.5 1565,835 1565,2075.2 1702.44,2212.64 1702.44,2216.57 1716.06,2230.2 R10.1
  Bottom Layer w20: IC1.28 1175,810 1185,800 JP4.3
RD6: IC1.29 JP4.2 R13.1 | length 1721
  Top Layer w20: JP4.2 1671.63,900 1686.63,915 2310,915 2335,940 2335,1323.39 2387.39,1375.78 R13.1
  Bottom Layer w20: IC1.29 JP4.2
RD7: IC1.30 JP4.1 R15.1 | length 1488.6
  Top Layer w20: JP4.1 1733.28,1000 1745,1011.72 1745,1319.15 1800,1374.15 2200.02,1374.15 2281.06,1455.2 R15.1
  Bottom Layer w20: IC1.30 JP4.1
RE0: IC1.8 JP3.7 | length 417.1
  Bottom Layer w20: JP3.7 152.5,1297.5 562.5,1297.5 IC1.8
RE1: IC1.9 JP3.8 | length 417.1
  Bottom Layer w20: JP3.8 152.5,1197.5 562.5,1197.5 IC1.9
RE2: IC1.10 JP3.9 | length 417.1
  Bottom Layer w20: JP3.9 152.5,1097.5 562.5,1097.5 IC1.10
RS: IC1.1 P1.1 R9.2 | length 1198.8
  Top Layer w20: P1.1 875,2335 875,2295 580,2000 575,2000 IC1.1 575,1990 580,1990 635,1990 660,1965 660,1806.36 866.36,1600 869.21,1600 R9.2
pads on no net: "JACK DC1.3" DS1.0 DS1.2 DS1.5 Y1.0

## Keep-outs
Keep-Out Layer:
  lines w10: -5,15 -5,2465 3090,2465 3175,2465 3175,15 -5,15

## Silkscreen, mask and mechanical layers (free items; w line width, h text height)
Top Overlay:
  text "Persion  / Counter" at -39.12,810 h40
  text "Design by: / HaDuyenDuc" at -24.91,725 h30